# EAGLE board motorshieldv2_jd (EAGLE 5.06)
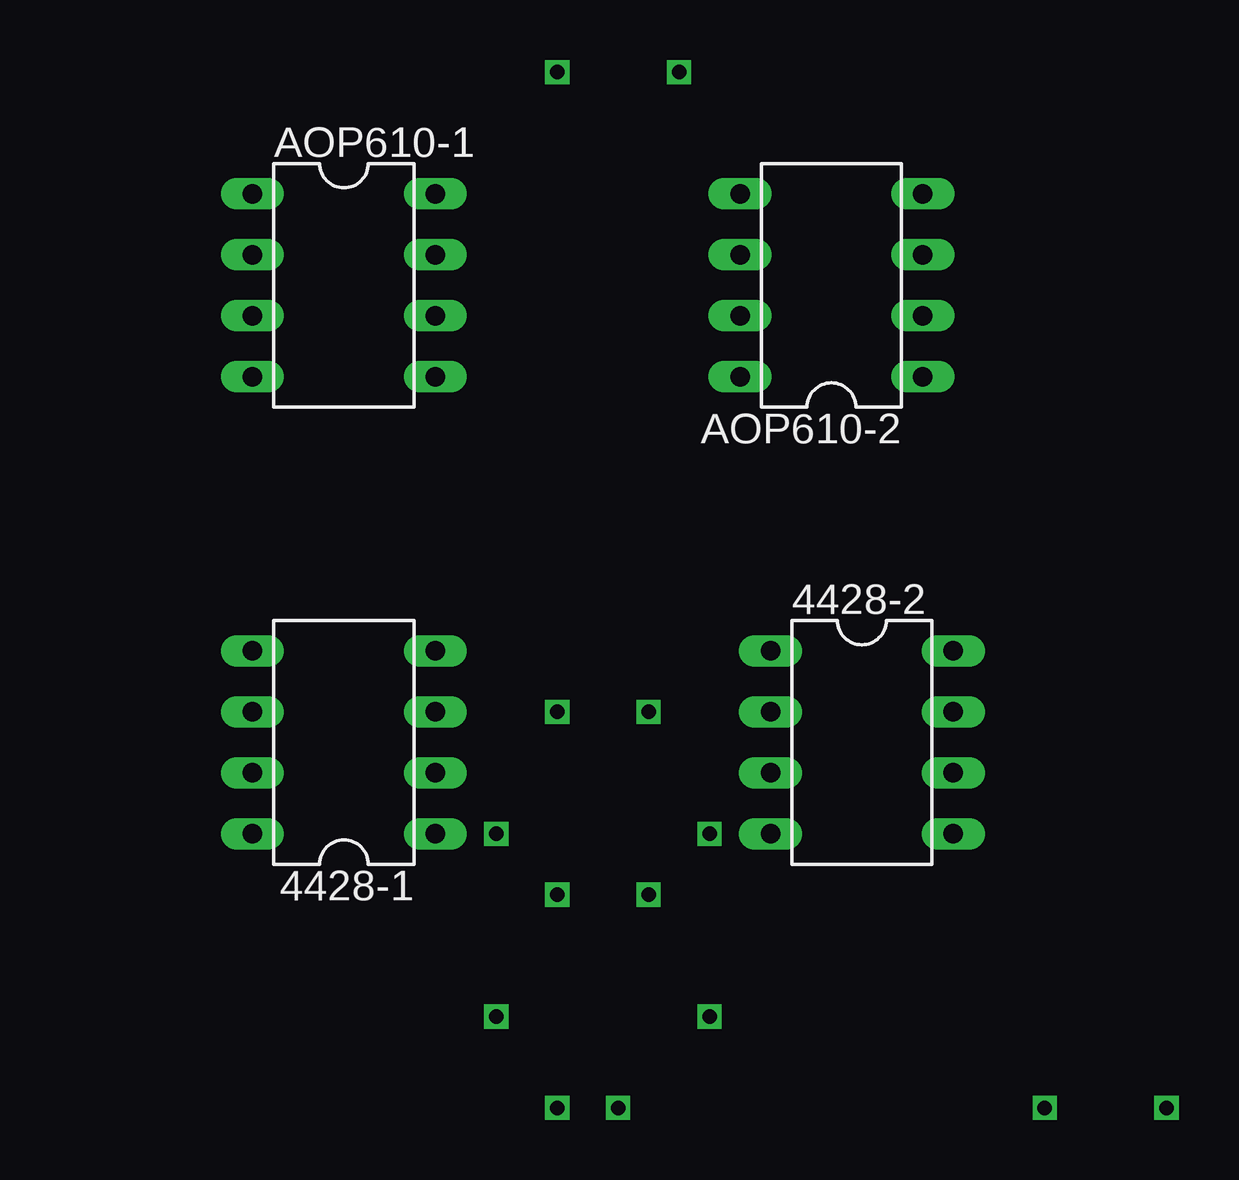
[diagram p0: board, top side]
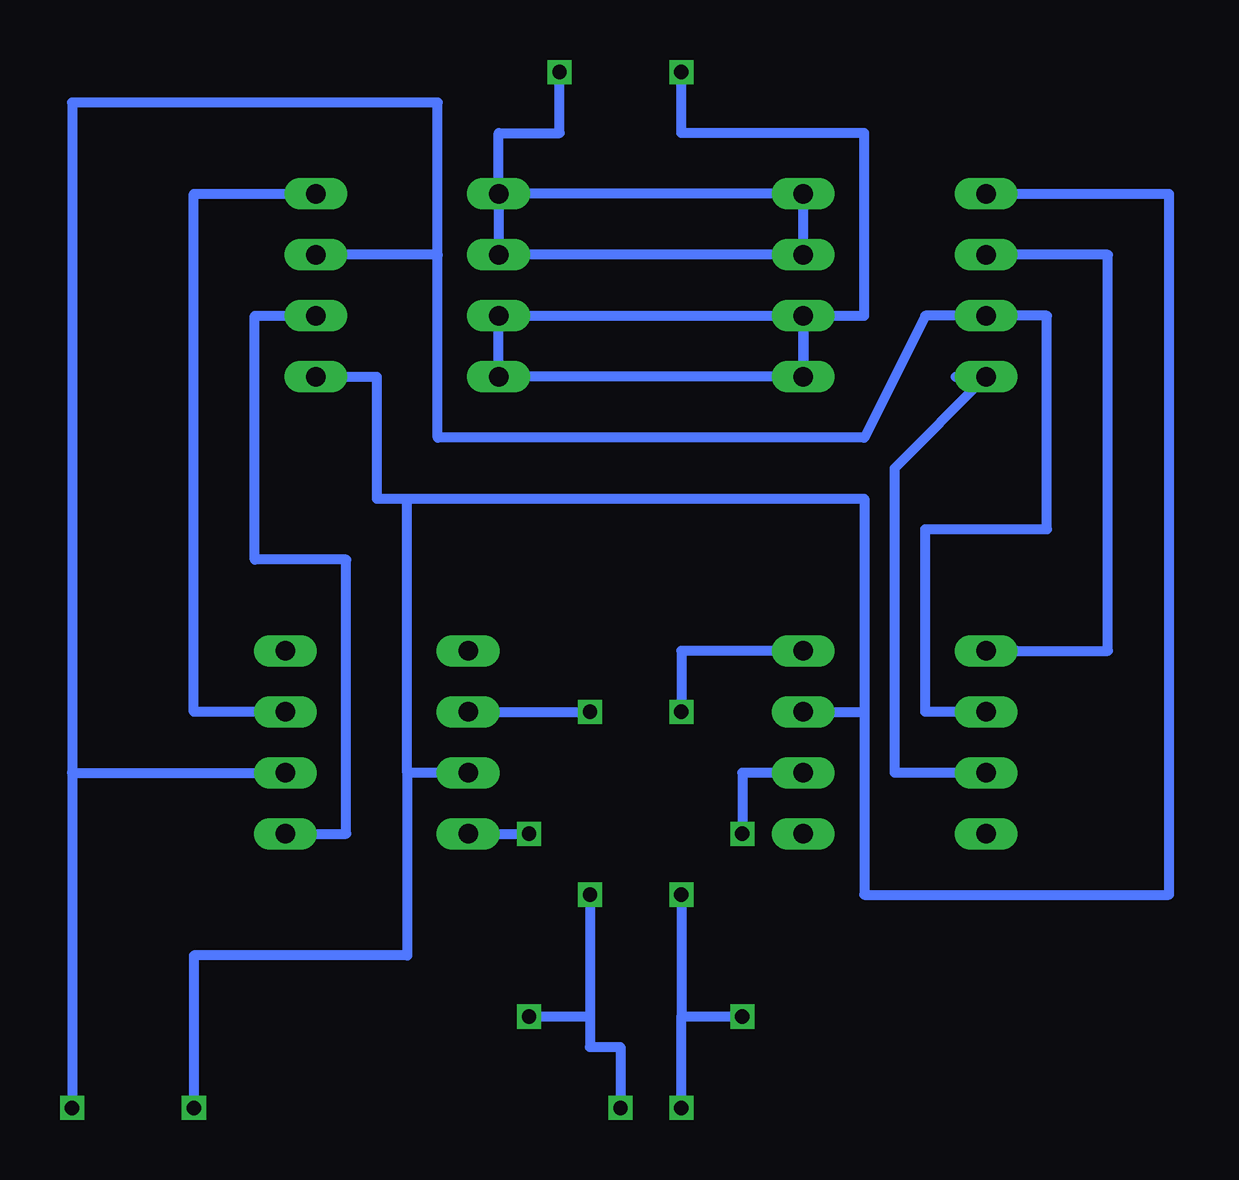
[diagram p1: board, bottom side, seen from below]

No outline drawn. Coordinates in mm, seen from the top.
Copper layers (1*16): Top 0.035mm / dielectric 1.5mm / Bottom 0.035mm
Design rules "default": minimum track width 10mil, minimum drill 24mil, track to track 8mil, track to pad 8mil, pad to pad 8mil, via to via 8mil, smd to smd 8mil, copper to edge 40mil, drill to drill 8mil, minimum pad ring 10mil, minimum via ring 8mil, stop-mask expansion 4mil, vias tented up to drill 0mil, thermal gap 10mil

## Footprints (pad centres in the part's own frame; a part is rotated, then mirrored left to right if it is on the bottom)
DIL08 = drill 0.813 long: 1 -3.81,-3.81; 2 -1.27,-3.81; 3 1.27,-3.81; 4 3.81,-3.81; 5 3.81,3.81; 6 1.27,3.81; 7 -1.27,3.81; 8 -3.81,3.81

## Placement (x,y rotation side)
4428-1  [DIL08]  31.75,41.91 90 top
4428-2  [DIL08]  53.34,41.91 270 top
AOP610-1  [DIL08]  31.75,60.96 270 top
AOP610-2  [DIL08]  52.07,60.96 90 top

## Library data of the parts
4428-1 4428-2 AOP610-1 AOP610-2 = 40xx

## Nets
+VDC: 4428-1.6 4428-2.6 AOP610-1.3 AOP610-2.3
GND: 4428-1.3 4428-2.3 AOP610-1.1 AOP610-2.1
M1: AOP610-1.5 AOP610-1.6 AOP610-2.7 AOP610-2.8
M2: AOP610-1.7 AOP610-1.8 AOP610-2.5 AOP610-2.6
P1: AOP610-1.4
S$1: 4428-1.4
S$2: 4428-2.2
S$3: 4428-1.2
S$4: 4428-2.4
S$11: 4428-1.5 AOP610-1.2
S$12: 4428-2.5 AOP610-2.2
S$13: 4428-2.7 AOP610-2.4
S$16: 4428-1.7

## Tracks (layer width: path | path; a pad name or v marks a point on that pad's centre or on a via)
+VDC  (via drill 0.6)
  Bottom 0.406: 4428-1.6 30.48,43.18 30.48,50.8 25.4,50.8 25.4,59.69 AOP610-1.3 30.48,59.69 33.02,54.61 50.8,54.61 50.8,62.23 | 50.8,62.23 AOP610-2.3 | 66.04,40.64 4428-2.6 | 50.8,62.23 50.8,68.58 66.04,68.58 66.04,40.64 | 66.04,40.64 v66.04,26.67
GND
  Bottom 0.406: AOP610-2.1 53.34,57.15 53.34,52.07 52.07,52.07 | 52.07,52.07 33.02,52.07 33.02,43.18 | 33.02,43.18 33.02,35.56 20.32,35.56 20.32,64.77 AOP610-1.1 | 4428-2.3 52.07,40.64 | 52.07,40.64 52.07,52.07 | 4428-1.3 33.02,43.18 | 52.07,40.64 52.07,33.02 60.96,33.02 60.96,26.67
M1  (via drill 0.6)
  Bottom 0.406: AOP610-1.5 AOP610-2.8 AOP610-2.7 | AOP610-2.7 AOP610-1.6 | AOP610-2.7 AOP610-1.6 | AOP610-1.6 AOP610-1.5 | AOP610-1.5 AOP610-1.6 | AOP610-1.6 33.02,59.69 33.02,67.31 40.64,67.31 v40.64,69.85
M2
  Bottom 0.406: AOP610-1.8 AOP610-2.5 | AOP610-1.8 AOP610-1.7 AOP610-2.6 AOP610-2.5 | AOP610-1.8 AOP610-2.5
P1
  Bottom 0.406: 29.21,57.15 AOP610-1.4
S$1  (via drill 0.6)
  Bottom 0.406: 4428-1.4 40.64,45.72 v40.64,43.18
S$2  (via drill 0.6)
  Bottom 0.406: 4428-2.2 v44.45,43.18
S$3  (via drill 0.6)
  Bottom 0.406: 4428-1.2 38.1,40.64 v38.1,38.1
S$4  (via drill 0.6)
  Bottom 0.406: 4428-2.4 v46.99,38.1
S$5  (via drill 0.6)
  other vias: 60.96,26.67
S$6  (via drill 0.6)
  Bottom 0.406: v40.64,35.56 40.64,30.48 | v40.64,26.67 40.64,30.48 | 40.64,30.48 v38.1,30.48
S$7  (via drill 0.6)
  other vias: 43.18,26.67
S$8  (via drill 0.6)
  Bottom 0.406: v46.99,30.48 44.45,30.48 | v44.45,35.56 44.45,30.48 | 44.45,30.48 44.45,29.21 43.18,29.21 43.18,26.67
S$9
  Bottom 0.406: 48.26,64.77 48.26,67.31 45.72,67.31 45.72,69.85
S$10  (via drill 0.6)
  other vias: 45.72,69.85
S$11
  Bottom 0.406: 26.67,45.72 4428-1.5 22.86,45.72 22.86,62.23 AOP610-1.2
S$12
  Bottom 0.406: 4428-2.5 54.61,38.1 54.61,49.53 58.42,49.53 58.42,59.69 AOP610-2.2
S$13
  Bottom 0.406: 4428-2.7 60.96,43.18 60.96,64.77 AOP610-2.4
S$16
  Bottom 0.406: 4428-1.7 31.75,40.64 31.75,53.34 27.94,57.15